# Altium PCB ESP-RC-Car.PcbDoc (part 1 of 2)
Units mm, origin at the board's own origin, x right, y up, seen from the top; angles counter-clockwise.
Board outline 95.25 x 60.25 mm, 4 copper layers (Top Layer, Int1 (Signal), Int2 (GND), Bottom Layer(PWR)), stack 1.586 mm thick; 116 components, 100 nets, 419 pads, 832 vias.
Unrouted connection lines stored in the file: 3.
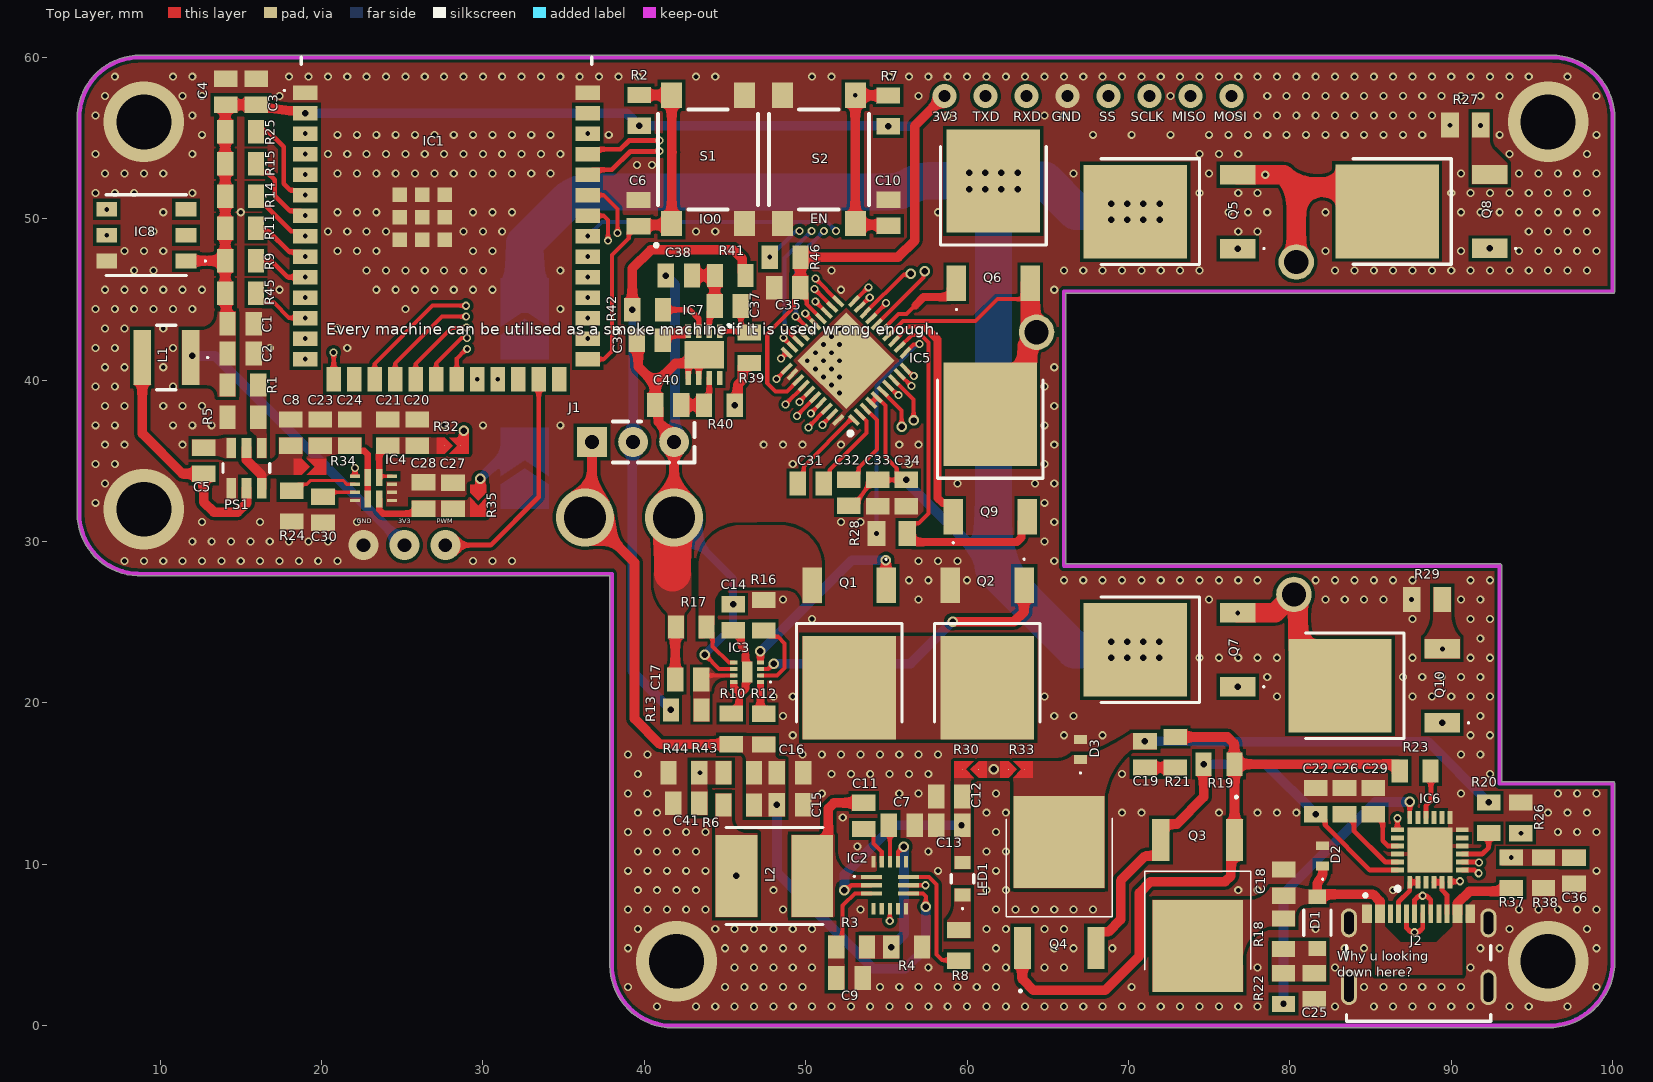
[diagram p0: Top Layer view]
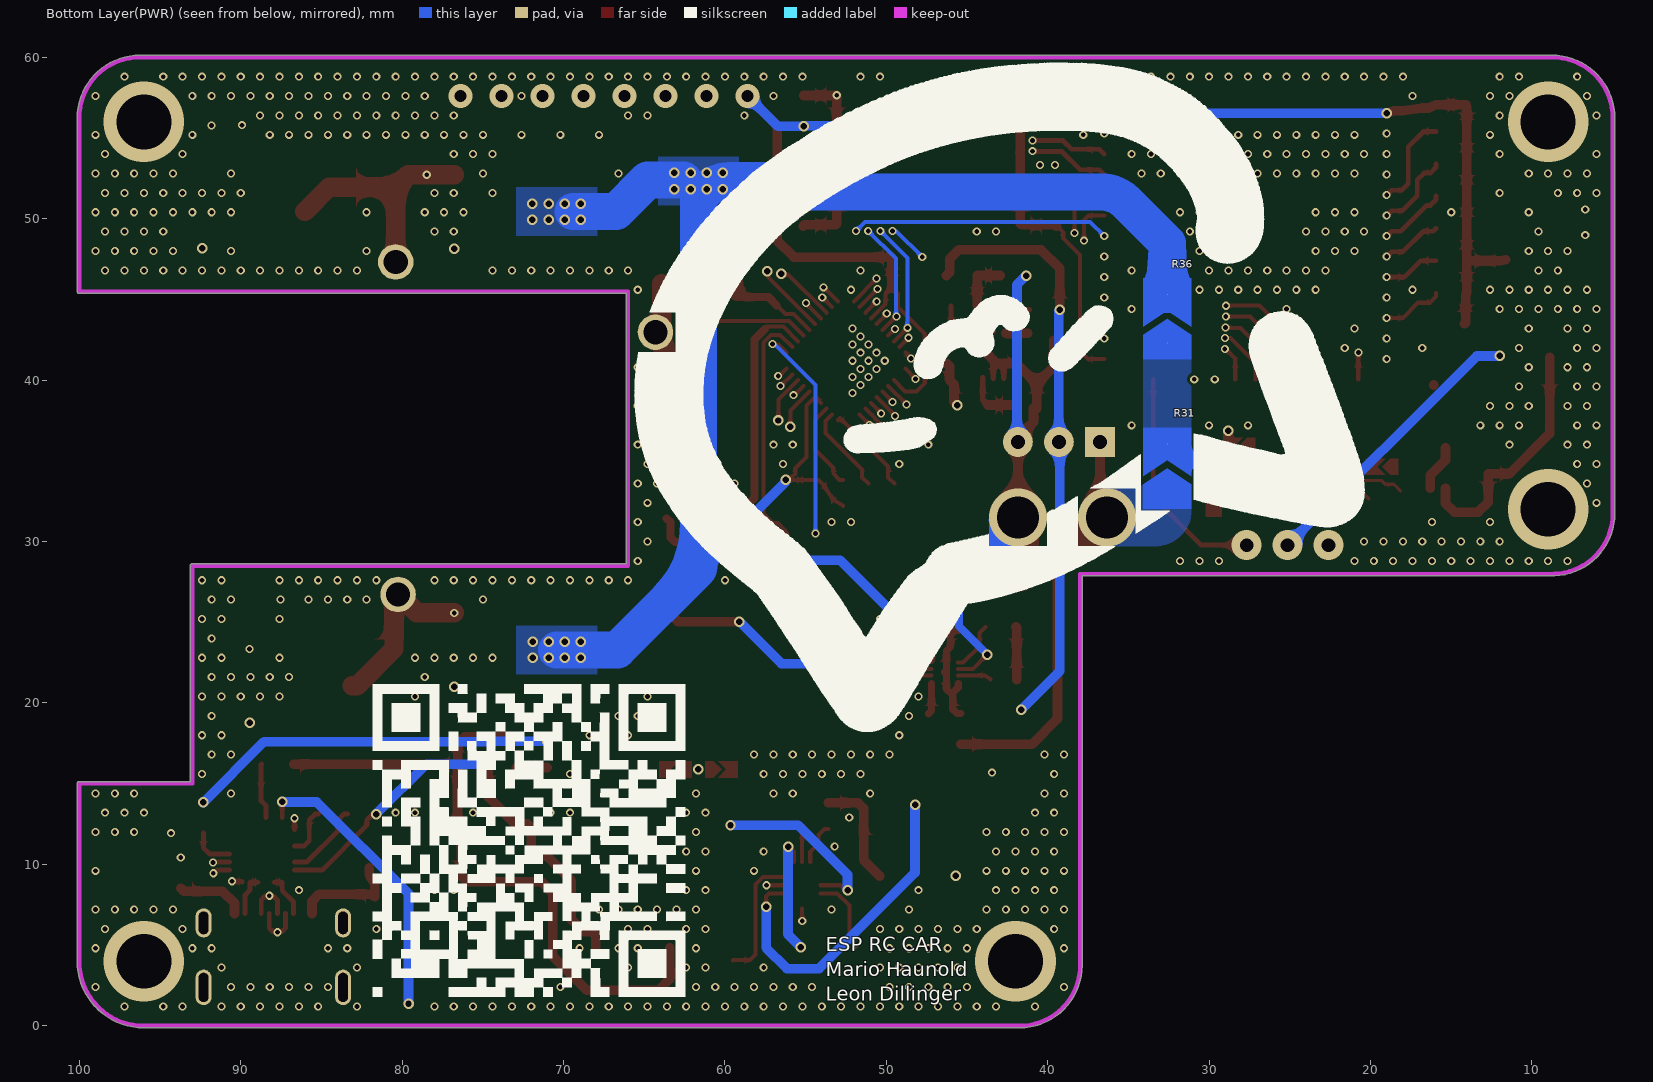
[diagram p1: Bottom Layer(PWR) view, seen from below]
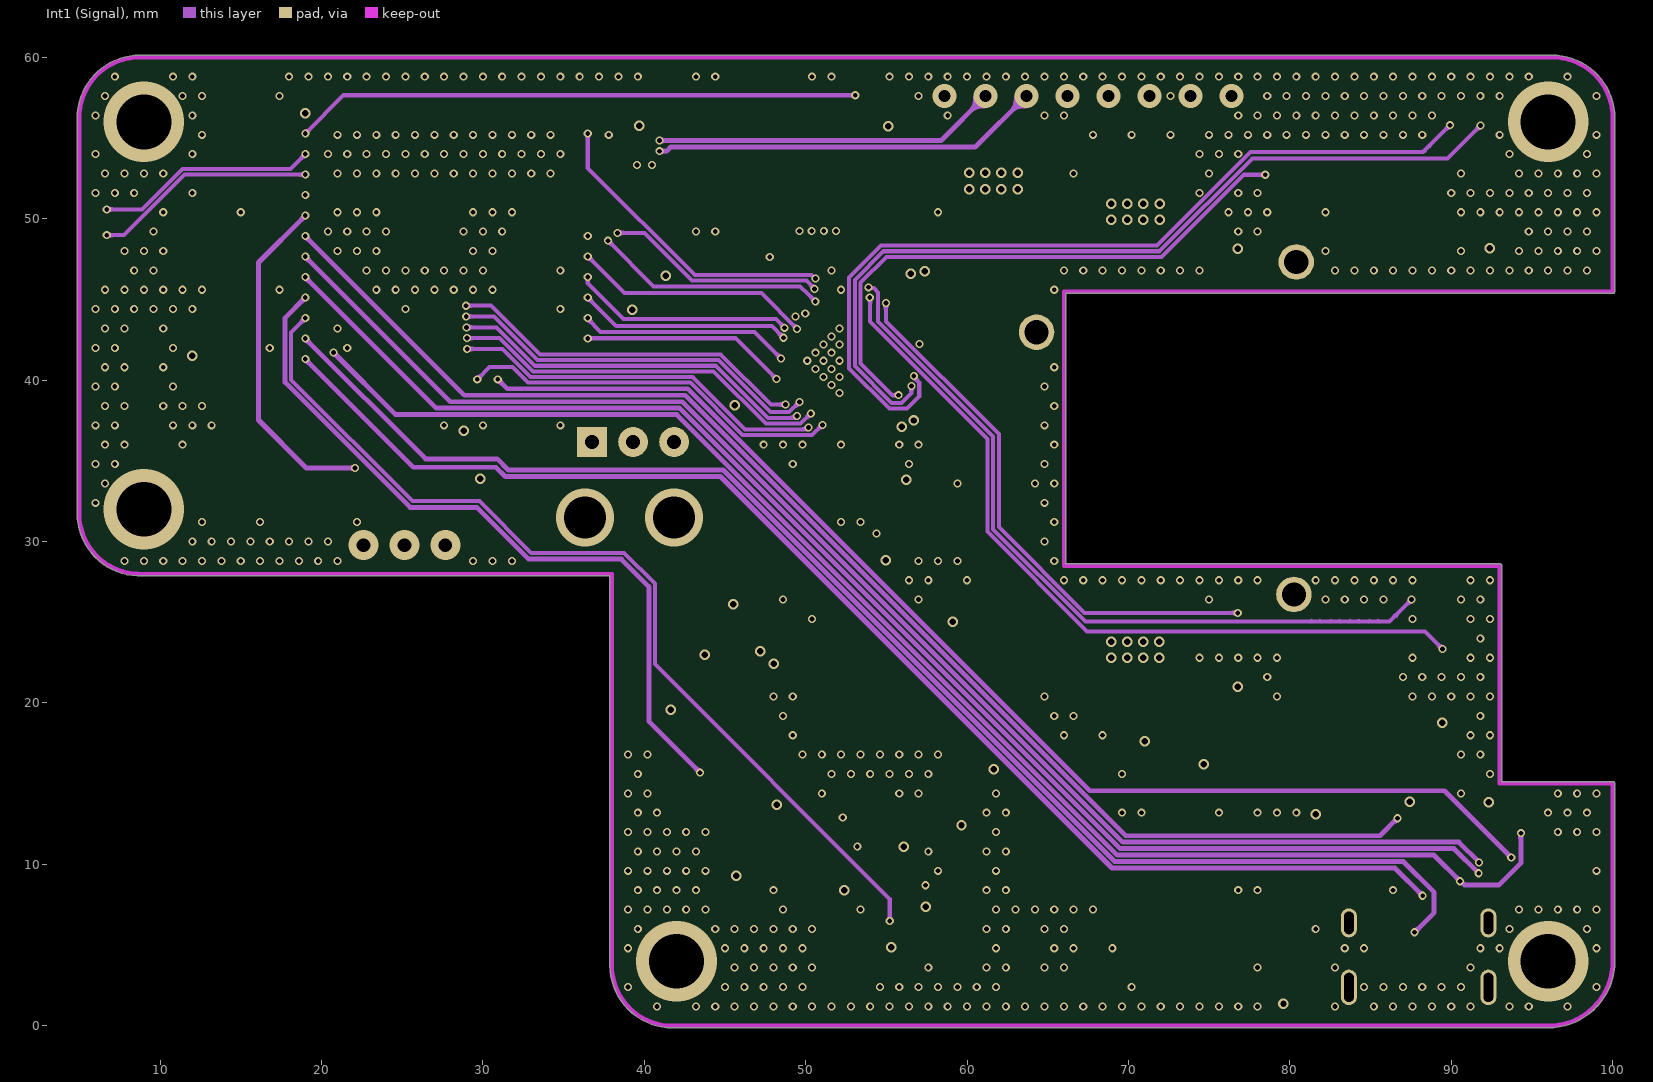
[diagram p2: Int1 (Signal)]
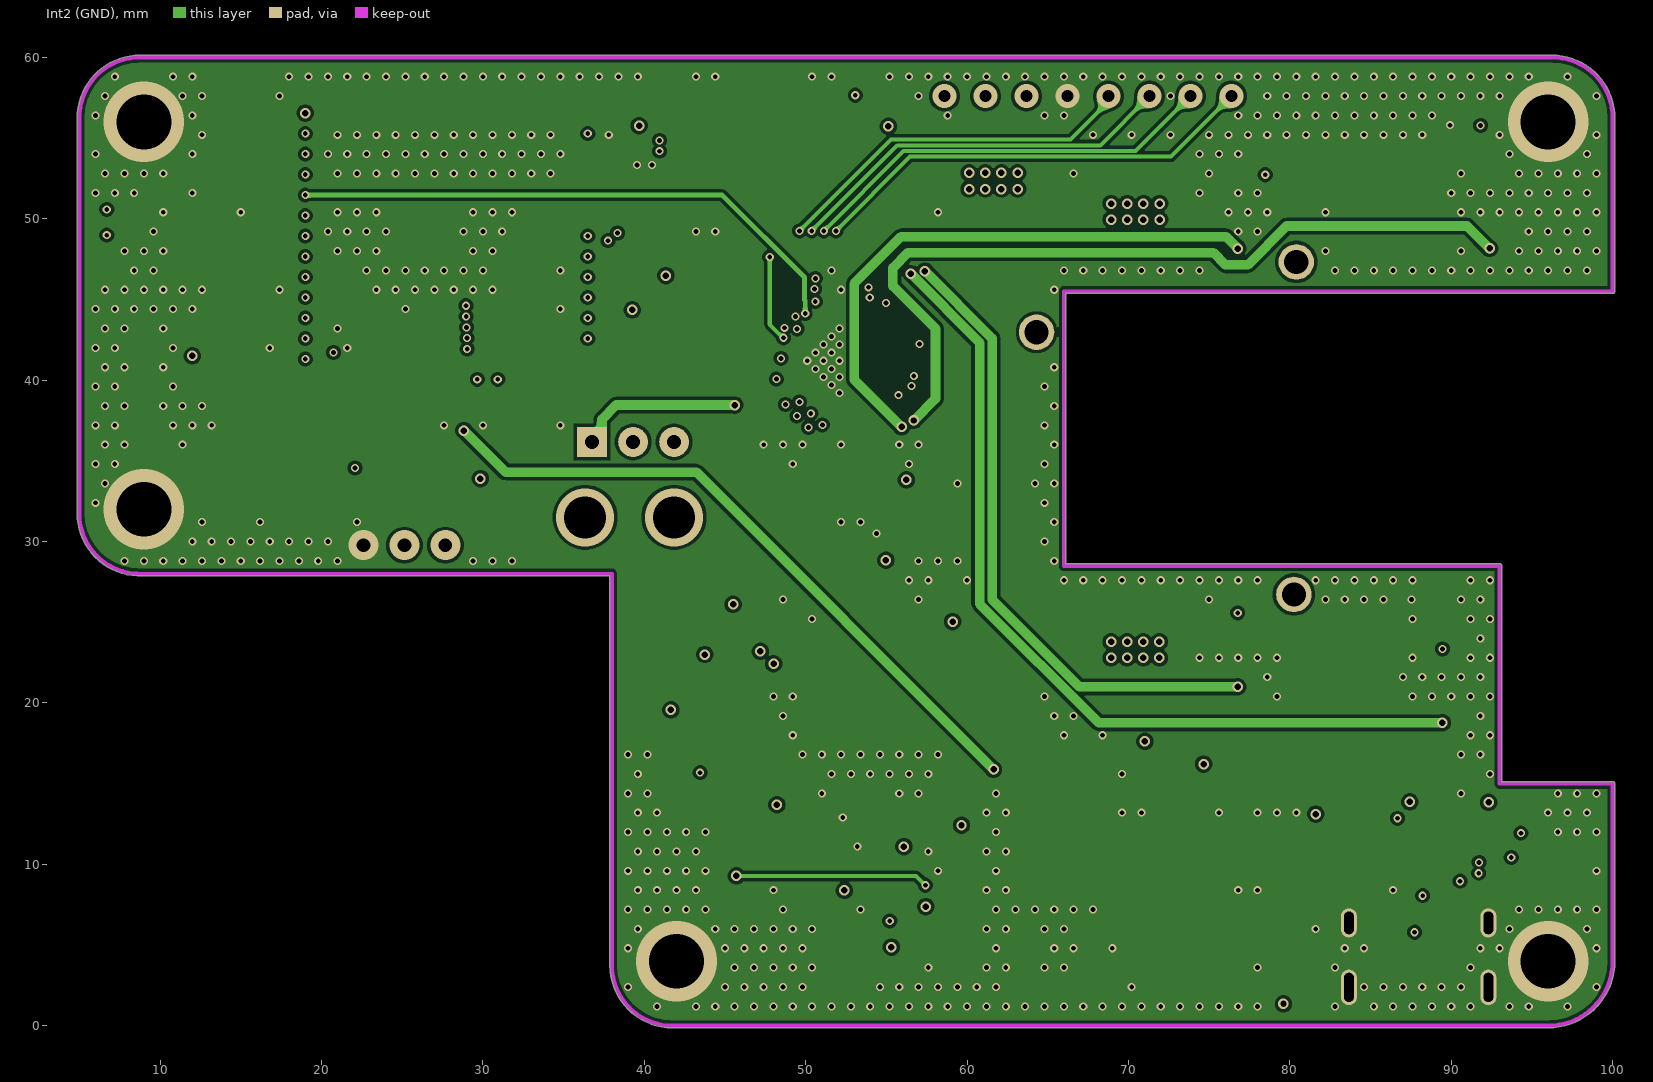
[diagram p3: Int2 (GND)]

## Layer stack, top to bottom
Top Solder: solder mask 0.0254, SM-001, Dk 4
Top Layer: signal copper 0.035
Dielectric 1: prepreg 0.2104, PP-017, Dk 4.3
Int1 (Signal): signal copper 0.0152
Dielectric 3: core 1.065, Core-039, Dk 4.8
Int2 (GND): signal copper 0.0152
Dielectric 5: prepreg 0.2104, PP-017, Dk 4.3
Bottom Layer(PWR): signal copper 0.035
Bottom Solder: solder mask 0.0254, SM-001, Dk 4

## Board outline
8.598,27.875 37.873,27.873 37.873,3.75 ccw(c41.75,3.75) 41.749,-0.127 41.75,-0.127 96,-0.127 ccw(c96,4) 100.127,4 100.127,5 100.127,15 ccw(c100,15) 100,15.127 93.127,15.127 93.127,28.5 ccw(c93,28.5) 93,28.627 66.127,28.627 66.127,45.373 100,45.373 ccw(c100,45.5) 100.127,45.5 100.127,56.25 ccw(c96.25,56.25) 96.25,60.127 8.8,60.127 8.75,60.127 ccw(c8.75,56.25) 4.873,56.25 4.873,31.75 ccw(c8.75,31.75)

## Design rules (kind name [scope] priority, off if disabled: settings)
Clearance [All] p1: gap=0.2 ignorepadtopadclearanceinfootprint=TRUE except(0.1: Arc-Arc Arc-Track Arc-SMDPad Arc-THPad Arc-Via Arc-Text Arc-Hole Track-Track Track-SMDPad Track-THPad Track-Via Track-Text Track-Hole SMDPad-SMDPad SMDPad-THPad SMDPad-Via SMDPad-Text SMDPad-Hole THPad-THPad THPad-Via THPad-Text THPad-Hole Via-Via Via-Text Via-Hole Text-Text Text-Hole)
HoleSize [All] p1: absolutevalues=TRUE maxlimit=10 minlimit=0.3 maxpercent=80.000 minpercent=20.000
HoleToHoleClearance [All] p1: gap=0.2 allowstackedmicrovias=TRUE
PlaneConnect [All] p1: planeconnectstyle=Direct reliefexpansion=0.508 reliefentries=4 reliefconductorwidth=0.254 reliefairgap=0.254
PolygonConnect [All] p1: connectstyle=Direct reliefconductorwidth=0.254 reliefentries=4 polygonreliefangle="90 Angle" airgapwidth=0.254
RoutingVias [All] p1: holewidth=10 width=10 viastyle="Through Hole" minholewidth=0.3 minwidth=0.4 maxholewidth=10 maxwidth=10
SilkToSolderMaskClearance [IsPad] p1: minsilkscreentomaskgap=0.15 clearancetoexposedcopper=TRUE
SolderMaskExpansion [All] p1: expansion=0 istentingtop=FALSE
SupplyNets "Schematic Supply Nets_10" [InNet('VBATM')] p1: voltage=0.000
SupplyNets "Schematic Supply Nets_9" [InNet('VBAT-')] p2: voltage=0.000
SupplyNets "Schematic Supply Nets_8" [InNet('VBAT+')] p3: voltage=0.000
SupplyNets "Schematic Supply Nets_2" [InNet('VDRAIN')] p4: voltage=0.000
SupplyNets "Schematic Supply Nets_3" [InNet('VBATJ')] p5: voltage=0.000
SupplyNets "Schematic Supply Nets_7" [InNet('GND')] p6: voltage=0.000
SupplyNets "Schematic Supply Nets_6" [InNet('VMCU')] p7: voltage=0.000
SupplyNets "Schematic Supply Nets_5" [InNet('VBUS')] p8: voltage=0.000
SupplyNets "Schematic Supply Nets_4" [InNet('VSYS')] p9: voltage=0.000
SupplyNets "Schematic Supply Nets" [InNet('3V3')] p10: voltage=0.000
Width [All] p1: maxlimit=10 minlimit=0.1 preferedwidth=0.254
26 further rules are at their usual default settings.

## Components (designator, comment, footprint, x,y, rotation, side; value= is the part's Value field where it differs from the comment)
C1 "0805 22uF" CAPC2012X94N 14.99,43.5 r0 top
C2 "0805 22uF" CAPC2012X94N 14.99,41.65 r0 top
C3 "0805 10uF" CAPC2012X94N 15.955,57.875 r270 top
C4 "0805 100nF" CAPC2012X94N 14.07,57.875 r270 top
C5 "0805 0.1uF" CAPC2012X94N 12.705,35.01 r270 top
C6 "0805 10nF" CAPC2012X94N 39.65,50.35 r270 top
C7 "0805 1uF" CAPC2012X94N 55.96,12.42 r0 top
C8 "0805 2.2uF" CAPC2012X94N 18.1,36.75 r270 top
C9 "0805 1uF" CAPC2012X94N 52.715,2.955 r180 top
C10 "0805 10nF" CAPC2012X94N 55.139,50.365 r90 top
C11 "0805 0.1uF" CAPC2012X94N 53.6,13 r90 top
C12 "0805 10uF" CAPC2012X94N 58.9,14.2 r0 top
C13 "0805 10uF" CAPC2012X94N 58.9,12.42 r0 top
C14 "0805 0.1uF" CAPC2012X94N 45.51,25.3 r270 top
C15 "0805 10uF" CAPC2012X94N 49.03,13.69 r180 top
C16 "0805 10uF" CAPC2012X94N 49.03,15.67 r180 top locked
C17 "0805 0.1F" CAPC2012X94N 42.73,21.455 r0 top
C18 "0805 100nF" CAPC2012X94N 79.615,8.87 r90 top
C19 "0805 100nF" CAPC2012X94N 71.02,16.81 r270 top
C20 "0805 1uF" CAPC2012X94N 25.94,36.75 r90 top
C21 "0805 10uF" CAPC2012X94N 24.109,36.75 r90 top
C22 "0805 1uF" CAPC2012X94N 81.605,13.92 r270 top
C23 "0805 1uF" CAPC2012X94N 19.925,36.75 r90 top
C24 "0805 10uF" CAPC2012X94N 21.75,36.75 r90 top
C25 "0805 100nF" CAPC2012X94N 81.51,2.455 r270 top
C26 "0805 1uF" CAPC2012X94N 83.385,13.92 r90 top
C27 "0805 1uF" CAPC2012X94N 28.158,32.846 r90 top
C28 "0805 10uF" CAPC2012X94N 26.325,32.85 r90 top
C29 "0805 1uF" CAPC2012X94N 85.165,13.92 r270 top
C30 "0805 1uF" CAPC2012X94N 20.1,31.975 r90 top
C31 "0805 47nF" CAPC2012X94N 50.31,33.595 r180 top
C32 "0805 1uF" CAPC2012X94N 52.675,33.015 r90 top
C33 "0805 0.1uF" CAPC2012X94N 54.46,33.01 r90 top
C34 "0805 10uF" CAPC2012X94N 56.24,33.01 r90 top
C35 "0805 0.1uF" CAPC2012X94N 48.865,45.73 r0 top
C36 "0805 10nF" CAPC2012X94N 97.605,9.605 r90 top
C37 "0805 0.1uF" CAPC2012X94N 45.175,44.595 r0 top
C38 "0805 0.1 uF" CAPC2012X94N 42.15,46.48 r0 top
C39 "0805 0.33uF" CAPC2012X94N 40.335,42.47 r0 top
C40 "0805 0.1uF" CAPC2012X94N 41.485,38.465 r0 top
C41 "0805 10nF" CAPC2012X94N 42.61,13.79 r0 top
D1 "Schottky" SODFL3517X110N 81.705,6.39 r90 top
D2 "ESDA25P35-1U1M" ESDA25P351U1M 82.03,10.525 r270 top
D3 "ESDA25P35-1U1M" ESDA25P351U1M 67.02,17.115 r270 top
IC1 "ESP32-S3-WROOM-1-N8" ESP32S3WROOM1N8R2 27.75,52.55 r0 top
IC2 "MP2615AGQ-Z" MP2615AGQZ 55.215,8.705 r0 top
IC3 "S-82B2AAA-A8T2U" S82B2AAAA8T2U 46.375,21.905 r90 top
IC4 "TPS2121RUXT" TPS2121RUXT 23.225,33.3 r90 top
IC5 "DRV8323SRTAR" QFN50P600X600X80-41N-D 52.505,41.205 r135 top
IC6 "STUSB4500QTR" QFN50P400X400X100-25N-D 88.68,10.89 r90 top
IC7 "BQ29200DRBT" SON65P300X300X100-9N-D 43.705,41.58 r270 top
IC8 "587-2056-247F" 5872056247F 9.16,48.98 r90 top
J1 "2s Battery" Sip-3 39.31,36.17 r0 top
J2 "USB4215-03-A_REVA" GCT_USB4215-03-A_REVA 87.98,2.375 r0 top
L1 "ASPI-4030S-5R6M-T" ASPI-4030S 10.4,41.4 r180 top
L2 "74404064068" INDPM6060X450N 48.06,9.28 r0 top
LED1 "150224BS73100" 150224BS73100 59.72,9.105 r90 top
PS1 "LMR51430XDDCR" SOT95P280X110-6N 15.355,34.55 r90 top
Q1 "IPD047N03LF2SATMA1" IPD047N03LF2SATMA1 52.695,23.055 r180 top
Q2 "IPD047N03LF2SATMA1" IPD047N03LF2SATMA1 61.245,23.055 r180 top
Q3 "DMP3007LK3-13" DMP3007LK313 74.289,6.52 r180 top
Q4 "DMP3007LK3-13" DMP3007LK313 65.709,9.805 r0 top
Q5 "IPD047N03LF2SATMA1" IPD047N03LF2SATMA1 72.54,50.44 r90 top
Q6 "IPD047N03LF2SATMA1" IPD047N03LF2SATMA1 61.63,50.225 r0 top
Q7 "IPD047N03LF2SATMA1" IPD047N03LF2SATMA1 72.535,23.29 r90 top
Q8 "IPD047N03LF2SATMA1" IPD047N03LF2SATMA1 88.14,50.45 r90 top
Q9 "IPD047N03LF2SATMA1" IPD047N03LF2SATMA1 61.44,35.775 r0 top
Q10 "IPD047N03LF2SATMA1" IPD047N03LF2SATMA1 85.215,21.06 r90 top
R1 "0805 100k" RESC2012X65N 15.14,39.7 r180 top
R2 "0805 22k" RESC2012X65N 39.686,56.714 r90 top
R3 "0805 10k" RESC2012X65N 52.845,4.88 r180 top
R4 "0805 10k" RESC2012X65N 56.25,4.88 r180 top
R5 "0805 22.1k" RESC2012X65N 15.14,37.7 r0 top
R6 "0805 50m" RESC2012X65N 45.86,13.68 r0 top
R7 "0805 22k" RESC2012X65N 55.125,56.675 r90 top
R8 "0805 1k" RESC2012X65N 59.495,4.98 r90 top
R9 "0805 22k" RESC2012X65N 14.995,47.395 r0 top
R10 "0805 100" RESC2012X65N 45.385,18.39 r270 top
R11 "0805 22k" RESC2012X65N 14.995,49.4 r0 top
R12 "0805 1k" RESC2012X65N 47.395,18.38 r270 top
R13 "0805 100" RESC2012X65N 42.6,19.565 r180 top
R14 "0805 22k" RESC2012X65N 14.995,51.4 r0 top
R15 "0805 22k" RESC2012X65N 14.995,53.405 r180 top
R16 "0805 1k" RESC2012X65N 47.4,25.43 r270 top
R17 "0805 4m" RESC2012X65N 42.915,24.705 r180 top
R18 "0805 470" RESC2012X65N 79.605,5.7 r90 top
R19 "0805 100k" RESC2012X65N 75.61,16.21 r180 top
R20 "0805 1k" RESC2012X65N 92.31,12.885 r90 top
R21 "0805 100" RESC2012X65N 72.91,16.94 r90 top
R22 "0805 1k" RESC2012X65N 79.605,2.305 r90 top
R23 "0805 22k" RESC2012X65N 87.755,15.785 r180 top
R24 "0805 22k" RESC2012X65N 18.15,32.2 r90 top
R25 "0805 24k" RESC2012X65N 14.995,55.4 r0 top
R26 "0805 100k" RESC2012X65N 94.31,12.88 r270 top
R27 "WSLP08057L000FEA18" RESC2013X58N 90.875,55.795 r0 top
R28 "WSLP08057L000FEA18" RESC2013X58N 55.345,30.49 r0 top
R29 "WSLP08057L000FEA18" RESC2013X58N 88.495,26.405 r0 top
R30 "Jumper" "Solder Jumper 5A" 61.21,16.38 r180 top
R31 "Jumper" "Solder Jumper 9A" 34.095,32.045 r90 top
R32 "Jumper" "Solder Jumper 5A" 27.13,35.445 r0 top
R33 "Jumper" "Solder Jumper 5A" 62.07,15.38 r0 top
R34 "Jumper" "Solder Jumper 5A" 18.29,34.14 r0 top
R35 "Jumper" "Solder Jumper 5A" 29.22,33.53 r270 top
R36 "Jumper" "Solder Jumper 9A" 34.095,41.305 r90 top
R37 "0805 1.8M" RESC2012X65N 93.715,9.475 r270 top
R38 "0805 1M" RESC2012X65N 95.715,9.475 r90 top
R39 "0805 160" RESC2012X65N 46.505,42.005 r270 top
R40 "0805 100" RESC2012X65N 44.655,38.455 r180 top
R41 "0805 260" RESC2012X65N 45.325,46.485 r0 top
R42 "0805 100" RESC2012X65N 40.205,44.355 r180 top
R43 "0805 1.8M" RESC2012X65N 45.86,15.68 r0 top
R44 "0805 1M" RESC2012X65N 42.46,15.68 r0 top
R45 "0805 22k" RESC2012X65N 14.995,45.395 r180 top
R46 "0805 24k" RESC2012X65N 48.725,47.62 r180 top
S1 "5x5mm Button" 430182070816 43.95,53.675 r90 top
S2 "5x5mm Button" 430182070816 50.825,53.675 r90 top

## Footprints (in the part's own frame and the unit in brackets; to place one, negate y for a bottom-side part, rotate by r counter-clockwise, add the part's x,y. Pads: shape width x height; smd on the part's side, far side on the other; paste and mask are expansions set on the pad)
150224BS73100 [mm]
  rect 0.8x1 smd: 1(-1,0) 2(1,0)
  silkscreen extent -1.9,-0.7 0.25,0.7, body extent -1.15,-0.7 1.15,0.7, height 1.31
5872056247F [mm]
  rect 0.9x1.3 smd: 1(-1.6,-2.46) 2(0,-2.46) 3(1.6,-2.46) 4(1.6,2.46) 5(0,2.46) 6(-1.6,2.46)
  silkscreen extent -2.5,-3.7 2.5,2.5, body extent -2.5,-2.68 2.5,2.68, height 1.58
430182070816 [mm]
  rect 1.55x1.3 smd: 1(-3.975,2.25) 2(-3.975,-2.25) 3(3.975,2.25) 4(3.975,-2.25)
  silkscreen extent -5.39,-3.1 3.1,3.29, body extent -4.5,-3.1 4.5,3.1, height 5
ASPI-4030S [mm]
  rect 1.1x3.4 smd: 1(-1.5,0) 2(1.5,0)
  silkscreen extent -2.6,-2 0.6,2, body extent -2,-2 2,2, height 3
CAPC2012X94N [mm]
  rect 1.02x1.47 smd: 1(-0.81,0) 2(0.81,0)
  body extent -1,-0.63 1,0.63, height 0.94
DMP3007LK313 [mm]
  rect 1.06x2.6 smd: 1(-2.286,-4.985) 3(2.286,-4.985)
  rect 5.632x5.7 smd: 2(-0.001,1.565)
  silkscreen extent -3.29,-7.7 3.29,3.05, body extent -3.3,-5.94 3.3,4.16, height 2.58
ESDA25P351U1M [mm]
  rect 0.55x0.8 smd: 1(0.625,0) 2(-0.625,0)
  silkscreen extent 1.4,-0.05 1.5,0.05, body extent -0.8,-0.5 0.8,0.5, height 0.57
ESP32S3WROOM1N8R2 [mm]
  rect 1.5x0.9 smd: 1(-8.75,5.26) 2(-8.75,3.99) 3(-8.75,2.72) 4(-8.75,1.45) 5(-8.75,0.18) 6(-8.75,-1.09) 7(-8.75,-2.36) 8(-8.75,-3.63) 9(-8.75,-4.9) 10(-8.75,-6.17) 11(-8.75,-7.44) 12(-8.75,-8.71) 13(-8.75,-9.98) 14(-8.75,-11.25) 27(8.75,-11.25) 28(8.75,-9.98) 29(8.75,-8.71) 30(8.75,-7.44) 31(8.75,-6.17) 32(8.75,-4.9) 33(8.75,-3.63) 34(8.75,-2.36) 35(8.75,-1.09) 36(8.75,0.18) 37(8.75,1.45) 38(8.75,2.72) 39(8.75,3.99) 40(8.75,5.26)
  rect 0.9x1.5 smd: 15(-6.985,-12.5) 16(-5.715,-12.5) 17(-4.445,-12.5) 18(-3.175,-12.5) 19(-1.905,-12.5) 20(-0.635,-12.5) 21(0.635,-12.5) 22(1.905,-12.5) 23(3.175,-12.5) 24(4.445,-12.5) 25(5.715,-12.5) 26(6.985,-12.5)
  rect 0.9x0.9 smd: 41(-1.5,-2.46) 42(-1.5,-1.06) 43(-2.9,-1.06) 44(-2.9,-2.46) 45(-2.9,-3.86) 46(-1.5,-3.86) 47(-0.1,-3.86) 48(-0.1,-2.46) 49(-0.1,-1.06)
  silkscreen extent -10.1,5.35 9,7.48, body extent -9,-12.75 9,12.75, height 2.7
GCT_USB4215-03-A_REVA [mm]
  rect 0.6x1.15 smd: A1_B12(-3.2,4.575) A4_B9(-2.4,4.575) B1_A12(3.2,4.575) B4_A9(2.4,4.575)
  rect 0.3x1.15 smd: A5(-1.25,4.575) A6(-0.25,4.575) A7(0.25,4.575) A8(1.25,4.575) B5(1.75,4.575) B6(0.75,4.575) B7(-0.75,4.575) B8(-1.75,4.575)
  oval 1x1.8 hole 0.6 slot 1.4 at 90 deg: SH1(-4.32,4) SH2(4.32,4)
  oval 1x2.2 hole 0.6 slot 1.8 at 90 deg: SH3(-4.32,0) SH4(4.32,0)
  silkscreen extent -4.47,-2.1 4.47,5.8, body extent -4.44,-2 4.5,4.75, height 3.28
INDPM6060X450N [mm]
  rect 2.6x5.1 smd: 1(-2.35,0) 2(2.35,0)
  silkscreen extent -3,-3 3,3, body extent -3,-3 3,3, height 4.5
IPD047N03LF2SATMA1 [mm]
  rect 1.2x2.2 smd: 1(-2.29,-4.235) 3(2.29,-4.235)
  rect 5.8x6.4 smd: 2(0,2.115)
  silkscreen extent -3.27,-5.9 3.27,4.24, body extent -3.3,-5.05 3.3,5.05, height 2.58
MP2615AGQZ [mm]
  rect 1.3x0.25 smd: 1(-1.15,0.5) 2(-1.15,0) 3(-1.15,-0.5) 9(1.15,-0.5) 10(1.15,0) 11(1.15,0.5)
  rect 0.25x0.7 smd: 4(-1,-1.45) 5(-0.5,-1.45) 6(0,-1.45) 7(0.5,-1.45) 8(1,-1.45) 12(1,1.45) 13(0.5,1.45) 14(0,1.45) 15(-0.5,1.45) 16(-1,1.45)
  silkscreen extent -2.25,0.5 -2.15,0.6, body extent -1.5,-1.5 1.5,1.5, height 1.1
QFN50P400X400X100-25N-D [mm]
  rect 0.8x0.3 smd: 1(-2,1.25) 2(-2,0.75) 3(-2,0.25) 4(-2,-0.25) 5(-2,-0.75) 6(-2,-1.25) 13(2,-1.25) 14(2,-0.75) 15(2,-0.25) 16(2,0.25) 17(2,0.75) 18(2,1.25)
  rect 0.3x0.8 smd: 7(-1.25,-2) 8(-0.75,-2) 9(-0.25,-2) 10(0.25,-2) 11(0.75,-2) 12(1.25,-2) 19(1.25,2) 20(0.75,2) 21(0.25,2) 22(-0.25,2) 23(-0.75,2) 24(-1.25,2)
  rect 2.8x2.8 smd: 25(0,0)
  silkscreen extent -2.52,1.88 -2.28,2.12, body extent -2.05,-2.05 2.05,2.05, height 1
QFN50P600X600X80-41N-D [mm]
  rect 0.85x0.25 smd: 1(-2.95,2.25) 2(-2.95,1.75) 3(-2.95,1.25) 4(-2.95,0.75) 5(-2.95,0.25) 6(-2.95,-0.25) 7(-2.95,-0.75) 8(-2.95,-1.25) 9(-2.95,-1.75) 10(-2.95,-2.25) 21(2.95,-2.25) 22(2.95,-1.75) 23(2.95,-1.25) 24(2.95,-0.75) 25(2.95,-0.25) 26(2.95,0.25) 27(2.95,0.75) 28(2.95,1.25) 29(2.95,1.75) 30(2.95,2.25)
  rect 0.25x0.85 smd: 11(-2.25,-2.95) 12(-1.75,-2.95) 13(-1.25,-2.95) 14(-0.75,-2.95) 15(-0.25,-2.95) 16(0.25,-2.95) 17(0.75,-2.95) 18(1.25,-2.95) 19(1.75,-2.95) 20(2.25,-2.95) 31(2.25,2.95) 32(1.75,2.95) 33(1.25,2.95) 34(0.75,2.95) 35(0.25,2.95) 36(-0.25,2.95) 37(-0.75,2.95) 38(-1.25,2.95) 39(-1.75,2.95) 40(-2.25,2.95)
  rect 4.25x4.25 smd: 41(0,0)
  silkscreen extent -3.5,2.88 -3.25,3.12, body extent -3,-3 3,3, height 1
RESC2012X65N [mm]
  rect 1x1.45 smd: 1(-0.95,0) 2(0.95,0)
  body extent -0.77,-0.4 0.77,0.4, height 0.46
RESC2013X58N [mm]
  rect 1.1x1.55 smd: 1(-0.95,0) 2(0.95,0)
  body extent -1.01,-0.64 1.01,0.64, height 0.36
S82B2AAAA8T2U [mm]
  rect 0.25x0.45 smd: 1(-0.6,-0.825) 2(-0.2,-0.825) 3(0.2,-0.825) 4(0.6,-0.825) 5(0.6,0.825) 6(0.2,0.825) 7(-0.2,0.825) 8(-0.6,0.825)
  rect 1.3x0.65 smd: 9(0,0)
  silkscreen extent -0.65,-1.5 -0.55,-1.4, body extent -0.8,-0.75 0.8,0.75, height 0.5
Sip-3 [mm]
  rect 1.85x1.85 hole 0.85: 1(-2.54,0)
  round 1.85 hole 0.85: 2(0,0) 3(2.54,0)
  silkscreen extent -1.23,-1.27 3.81,1.27
SODFL3517X110N [mm]
  rect 0.92x1.08 smd: 1(-1.6,0) 2(1.6,0)
  silkscreen extent -0.79,-0.85 0.79,0.85, body extent -1.75,-1.09 1.75,0.91, height 1.07
"Solder Jumper 5A" [mm]
  round 0.025 smd: 1(0.5,0.5) 2(1.5,0.5)
  Top Layer region: 0.8,0 1.3,0.5 0.8,1 2,1 2,0
  Top Layer region: 0,0 0,1 0.5,1 1,0.5 0.5,0
"Solder Jumper 9A" [mm]
  round 0.025 smd far side: 1(1,1.5) 2(4,1.5)
  Bottom Layer(PWR) region: 2,0 3,1.5 2,3 5,3 5,0
  Bottom Layer(PWR) region: 0,0 0,3 1.5,3 2.5,1.5 1.5,0
SON65P300X300X100-9N-D [mm]
  rect 0.85x0.35 smd: 1(-1.45,0.975) 2(-1.45,0.325) 3(-1.45,-0.325) 4(-1.45,-0.975) 5(1.45,-0.975) 6(1.45,-0.325) 7(1.45,0.325) 8(1.45,0.975)
  rect 1.7x2.45 smd: 9(0,0)
  silkscreen extent -1.84,1.53 -1.75,1.7, body extent -1.5,-1.5 1.5,1.5, height 0.77
SOT95P280X110-6N [mm]
  rect 1.25x0.6 smd: 1(-1.25,0.95) 2(-1.25,0) 3(-1.25,-0.95) 4(1.25,-0.95) 5(1.25,0) 6(1.25,0.95)
  silkscreen extent -0.27,-1.45 0.27,1.45, body extent -1.4,-1.45 1.4,1.45, height 0.97
TPS2121RUXT [mm]
  rect 1.05x0.4 smd: 1(-0.675,0.35) 2(-0.675,-0.35) 7(0.675,-0.35) 8(0.675,0.35)
  rect 0.2x0.6 smd: 3(-0.75,-1.15) 4(-0.25,-1.15) 5(0.25,-1.15) 6(0.75,-1.15) 9(0.75,1.15) 10(0.25,1.15) 11(-0.25,1.15) 12(-0.75,1.15)
  body extent -1.05,-1.3 1.05,1.3, height 1

## Part data
C1 C2: library part 08055A150JAT2A, "Capacitor 25V", Manufacturer_Name="Kyocera AVX", Mouser Part Number=581-08055A150J, Arrow Part Number=08055A150JAT2A, Arrow Price/Stock=https://www.arrow.com/en/products/08055a150jat2a/avx?region=nac, Datasheet Link=https://componentsearchengine.com/Datasheets/1/06031A100FAT2A.pdf, Height=0.94mm, Manufacturer_Part_Number=08055A150JAT2A, Mouser Price/Stock=https://www.mouser.co.uk/ProductDetail/AVX/08055A150JAT2A?qs=pZVDklL%2Fs8hiEua37sqbaA%3D%3D
C3 C4 C5 C6 C7 C8 C9 C10 C11 C12 C13 C14 C15 C16 C17 C36 C37 C38 C39 C40 C41: library part 08055A150JAT2A, "Capacitor", Manufacturer_Name="Kyocera AVX", Mouser Part Number=581-08055A150J, Arrow Part Number=08055A150JAT2A, Arrow Price/Stock=https://www.arrow.com/en/products/08055a150jat2a/avx?region=nac, Datasheet Link=https://componentsearchengine.com/Datasheets/1/06031A100FAT2A.pdf, Height=0.94mm, Manufacturer_Part_Number=08055A150JAT2A, Mouser Price/Stock=https://www.mouser.co.uk/ProductDetail/AVX/08055A150JAT2A?qs=pZVDklL%2Fs8hiEua37sqbaA%3D%3D
C18 C19 C20 C21 C22 C23 C24 C25 C26 C27 C28 C29 C30 C31 C34 C35: library part 08055A150JAT2A, "0805", Manufacturer_Name="Kyocera AVX", Mouser Part Number=581-08055A150J, Arrow Part Number=08055A150JAT2A, Arrow Price/Stock=https://www.arrow.com/en/products/08055a150jat2a/avx?region=nac, Datasheet Link=https://componentsearchengine.com/Datasheets/1/06031A100FAT2A.pdf, Height=0.94mm, Manufacturer_Part_Number=08055A150JAT2A, Mouser Price/Stock=https://www.mouser.co.uk/ProductDetail/AVX/08055A150JAT2A?qs=pZVDklL%2Fs8hiEua37sqbaA%3D%3D
C32: library part 08055A150JAT2A, "0805 16V X5R/X7R", Manufacturer_Name="Kyocera AVX", Mouser Part Number=581-08055A150J, Arrow Part Number=08055A150JAT2A, Arrow Price/Stock=https://www.arrow.com/en/products/08055a150jat2a/avx?region=nac, Datasheet Link=https://componentsearchengine.com/Datasheets/1/06031A100FAT2A.pdf, Height=0.94mm, Manufacturer_Part_Number=08055A150JAT2A, Mouser Price/Stock=https://www.mouser.co.uk/ProductDetail/AVX/08055A150JAT2A?qs=pZVDklL%2Fs8hiEua37sqbaA%3D%3D
C33: library part 08055A150JAT2A, "0805 VM rated", Manufacturer_Name="Kyocera AVX", Mouser Part Number=581-08055A150J, Arrow Part Number=08055A150JAT2A, Arrow Price/Stock=https://www.arrow.com/en/products/08055a150jat2a/avx?region=nac, Datasheet Link=https://componentsearchengine.com/Datasheets/1/06031A100FAT2A.pdf, Height=0.94mm, Manufacturer_Part_Number=08055A150JAT2A, Mouser Price/Stock=https://www.mouser.co.uk/ProductDetail/AVX/08055A150JAT2A?qs=pZVDklL%2Fs8hiEua37sqbaA%3D%3D
D1: library part PMEG3010ER, "Schottky Diode", Manufacturer_Name=Nexperia, Mouser Part Number=N/A, Datasheet Link=https://datasheet.datasheetarchive.com/originals/distributors/Datasheets-NXP/DSANXP010004875.pdf, Height=1.1mm, Manufacturer_Part_Number=PMEG3010ER, Mouser Price/Stock=https://www.mouser.co.uk/ProductDetail/Nexperia/PMEG3010ER?qs=vHuUswq2%252BswA%252BkrsHFmQzA%3D%3D
D2 D3: "TVS Diode (Uni-directional)", Manufacturer_Name=STMicroelectronics, Mouser Part Number=511-ESDA25P35-1U1M, Arrow Part Number=ESDA25P35-1U1M, Arrow Price/Stock=https://www.arrow.com/en/products/esda25p35-1u1m/stmicroelectronics?utm_currency=USD&region=europe, Datasheet Link=https://www.st.com/resource/en/datasheet/esda25p35-1u1m.pdf, Height=0.6mm, Manufacturer_Part_Number=ESDA25P35-1U1M, Mouser Price/Stock=https://www.mouser.co.uk/ProductDetail/STMicroelectronics/ESDA25P35-1U1M?qs=aVyJF2WnouQUWqgNP85ZrA%3D%3D
IC1: "Integrated Circuit", Manufacturer_Name="Espressif Systems", Mouser Part Number=356-ESP32-S3WROOM1N8, Datasheet Link=https://www.espressif.com/sites/default/files/documentation/esp32-s3-wroom-1_wroom-1u_datasheet_en.pdf, Height=3.25mm, Manufacturer_Part_Number=ESP32-S3-WROOM-1-N8, Mouser Price/Stock=https://www.mouser.co.uk/ProductDetail/Espressif-Systems/ESP32-S3-WROOM-1-N8?qs=Wj%2FVkw3K%252BMC1mq0KGPvoSQ%3D%3D
IC2: "Integrated Circuit", Manufacturer_Name="Monolithic Power Systems (MPS)", Mouser Part Number=946-MP2615AGQ-Z, Datasheet Link=https://www.monolithicpower.com/en/documentview/productdocument/index/version/2/document_type/Datasheet/lang/en/sku/MP2615AGQ-Z/document_id/1433/, Height=1mm, Manufacturer_Part_Number=MP2615AGQ-Z, Mouser Price/Stock=https://www.mouser.co.uk/ProductDetail/Monolithic-Power-Systems-MPS/MP2615AGQ-Z?qs=HiriQ40UqETtGEPnTGZTNQ%3D%3D
IC3: "Integrated Circuit", Manufacturer_Name="ABLIC Inc.", Mouser Part Number=628-S-82B2AAA-A8T2U, Datasheet Link=https://www.ablic.com/en/doc/datasheet/battery_protection/S82B2A_B_E.pdf, Height=0.4mm, Manufacturer_Part_Number=S-82B2AAA-A8T2U, Mouser Price/Stock=https://www.mouser.co.uk/ProductDetail/ABLIC/S-82B2AAA-A8T2U?qs=t7xnP681wgVKFpRRRjY2ng%3D%3D
IC4: "Integrated Circuit", Manufacturer_Name="Texas Instruments", Mouser Part Number=595-TPS2121RUXT, Arrow Part Number=TPS2121RUXT, Arrow Price/Stock=https://www.arrow.com/en/products/tps2121ruxt/texas-instruments?utm_currency=USD&region=nac, Datasheet Link=https://www.arrow.com/en/products/tps2121ruxt/texas-instruments, Height=1mm, Manufacturer_Part_Number=TPS2121RUXT, Mouser Price/Stock=https://www.mouser.co.uk/ProductDetail/Texas-Instruments/TPS2121RUXT?qs=l7cgNqFNU1i6abJCbO5ulQ%3D%3D
IC5: "Integrated Circuit", Manufacturer_Name="Texas Instruments", Mouser Part Number=595-DRV8323SRTAR, Arrow Part Number=DRV8323SRTAR, Arrow Price/Stock=https://www.arrow.com/en/products/drv8323srtar/texas-instruments?utm_currency=USD&region=nac, Datasheet Link=http://www.ti.com/lit/ds/symlink/drv8323.pdf, Height=0.8mm, Manufacturer_Part_Number=DRV8323SRTAR, Mouser Price/Stock=https://www.mouser.co.uk/ProductDetail/Texas-Instruments/DRV8323SRTAR?qs=u4fy%2FsgLU9P2gpPTX6mffg%3D%3D
IC6: "Integrated Circuit", Manufacturer_Name=STMicroelectronics, Mouser Part Number=511-STUSB4500QTR, Arrow Part Number=STUSB4500QTR, Arrow Price/Stock=https://www.arrow.com/en/products/stusb4500qtr/stmicroelectronics?utm_currency=USD&region=europe, Datasheet Link=https://www.st.com/resource/en/datasheet/stusb4500.pdf, Height=1mm, Manufacturer_Part_Number=STUSB4500QTR, Mouser Price/Stock=https://www.mouser.co.uk/ProductDetail/STMicroelectronics/STUSB4500QTR?qs=wUXugUrL1qyQbYMSzG1ujg%3D%3D
IC7: "Integrated Circuit", Manufacturer_Name="Texas Instruments", Mouser Part Number=595-BQ29200DRBT, Arrow Part Number=BQ29200DRBT, Arrow Price/Stock=https://www.arrow.com/en/products/bq29200drbt/texas-instruments?region=nac, Datasheet Link=http://www.ti.com/lit/ds/symlink/bq29200.pdf, Height=1mm, Manufacturer_Part_Number=BQ29200DRBT, Mouser Price/Stock=https://www.mouser.co.uk/ProductDetail/Texas-Instruments/BQ29200DRBT?qs=hEBn5lgDlCoXGMNHcYEAng%3D%3D
IC8: "Integrated Circuit", Manufacturer_Name=Dialight, Datasheet Link=https://s3-us-west-2.amazonaws.com/catsy.557/Dialight_datasheet_587-2056-247F_Addressable_RGB.pdf, Height=1.6mm, Manufacturer_Part_Number=587-2056-247F
J1: library part CON3, "Stecker"
J2: "USB-C (USB TYPE-C) USB 2.0 Receptacle Connector 24 (16+8 Dummy) Position Surface Mount, Right Angle; Through Hole", Package=None, Check_prices=https://www.snapeda.com/parts/USB4215-03-A/Global+Connector+Technology/view-part/?ref=eda, MF="Global Connector Technology", MP=USB4215-03-A, SnapEDA_Link=https://www.snapeda.com/parts/USB4215-03-A/Global+Connector+Technology/view-part/?ref=snap
L1: "Inductor", Manufacturer_Name=ABRACON, Mouser Part Number=815-ASPI-4030S-5R6MT, Datasheet Link=https://abracon.com/Magnetics/power/ASPI-4030S.pdf, Height=3mm, Manufacturer_Part_Number=ASPI-4030S-5R6M-T, Mouser Price/Stock=https://www.mouser.co.uk/ProductDetail/ABRACON/ASPI-4030S-5R6M-T?qs=BLmuIjeT3qEs6vBfg%2FqMFg%3D%3D
L2: "Inductor", Manufacturer_Name="Wurth Elektronik", Mouser Part Number=710-74404064068, Datasheet Link=https://katalog.we-online.com/pbs/datasheet/74404064068.pdf, Height=4.5mm, Manufacturer_Part_Number=74404064068, Mouser Price/Stock=https://www.mouser.co.uk/ProductDetail/Wurth-Elektronik/74404064068?qs=Zt3UNFD9mQgMbZzq9pg0zg%3D%3D
LED1: "LED", Manufacturer_Name="Wurth Elektronik", Mouser Part Number=710-150224BS73100, Datasheet Link=https://www.we-online.com/components/products/datasheet/150224BS73100.pdf, Height=1.41mm, Manufacturer_Part_Number=150224BS73100, Mouser Price/Stock=https://www.mouser.co.uk/ProductDetail/Wurth-Elektronik/150224BS73100?qs=5aG0NVq1C4w%2FjMuF9nAPXA%3D%3D
PS1: "Power Supply 500kHz", Manufacturer_Name="Texas Instruments", Mouser Part Number=595-LMR51430XDDCR, Arrow Part Number=LMR51430XDDCR, Arrow Price/Stock=https://www.arrow.com/en/products/lmr51430xddcr/texas-instruments?utm_currency=USD&region=nac, Datasheet Link=https://www.ti.com/lit/ds/symlink/lmr51430.pdf?HQS=dis-mous-null-mousermode-dsf-pf-null-wwe&ts=1665567212982&ref_url=https%253A%252F%252Fwww.mouser.co.uk%252F, Height=1.1mm, Manufacturer_Part_Number=LMR51430XDDCR, Mouser Price/Stock=https://www.mouser.co.uk/ProductDetail/Texas-Instruments/LMR51430XDDCR?qs=vvQtp7zwQdP8miJIr5Aupg%3D%3D
Q1 Q2 Q5 Q6 Q7 Q8 Q9 Q10: "MOSFET (N-Channel)", Manufacturer_Name=Infineon, Mouser Part Number=726-IPD047N03LF2SATM, Datasheet Link=https://www.infineon.com/cms/en/product/power/mosfet/n-channel/ipd047n03lf2s/, Height=2.52mm, Manufacturer_Part_Number=IPD047N03LF2SATMA1, Mouser Price/Stock=https://www.mouser.co.uk/ProductDetail/Infineon-Technologies/IPD047N03LF2SATMA1?qs=3vio67wFuYq5Cj1%2F9iYlBQ%3D%3D
Q3 Q4: "MOSFET (P-Channel)", Manufacturer_Name="Diodes Incorporated", Mouser Part Number=621-DMP3007LK3-13, Datasheet Link=https://www.diodes.com/assets/Datasheets/DMP3007LK3.pdf, Height=2.39mm, Manufacturer_Part_Number=DMP3007LK3-13, Mouser Price/Stock=https://www.mouser.co.uk/ProductDetail/Diodes-Incorporated/DMP3007LK3-13?qs=17u8i%2FzlE8%252BiIxnE0yV1ZQ%3D%3D
R1 R3 R4 R5 R6 R8 R10 R12 R13 R16 R17 R39 R40 R41 R42: library part CPF0805B102RE1, "Resistor low tolerance", Manufacturer_Name="TE Connectivity", Datasheet Link=http://docs-europe.electrocomponents.com/webdocs/13d1/0900766b813d116f.pdf, Height=0.65mm, Manufacturer_Part_Number=CPF0805B102RE1
R2 R7 R9 R11 R14 R15 R18 R19 R20 R21 R22 R23 R24 R25 R26 R30 R31 R32 R33 R34 R35 R36 R37 R38 R43 R44 R45 R46: library part CPF0805B102RE1, "Resistor", Manufacturer_Name="TE Connectivity", Datasheet Link=http://docs-europe.electrocomponents.com/webdocs/13d1/0900766b813d116f.pdf, Height=0.65mm, Manufacturer_Part_Number=CPF0805B102RE1
R27 R28 R29: "Resistor", Manufacturer_Name=Vishay, Mouser Part Number=71-WSLP08057L000FEA1, Arrow Part Number=WSLP08057L000FEA18, Arrow Price/Stock=https://www.arrow.com/en/products/wslp08057l000fea18/vishay?region=nac, Datasheet Link=https://www.vishay.com/docs/30298/wslp18.pdf, Height=0.584mm, Manufacturer_Part_Number=WSLP08057L000FEA18, Mouser Price/Stock=https://www.mouser.co.uk/ProductDetail/Vishay-Dale/WSLP08057L000FEA18?qs=yAJ577jGV70jP0rOIAdIIA%3D%3D
S1 S2: library part 430182050816, "Switch", Manufacturer_Name="Wurth Elektronik", Mouser Part Number=710-430182050816, Datasheet Link=http://katalog.we-online.de/em/datasheet/4301x2xxx8x6.pdf, Manufacturer_Part_Number=430182050816, Mouser Price/Stock=https://www.mouser.co.uk/ProductDetail/Wurth-Elektronik/430182050816?qs=wr8lucFkNMUyle0jQPgWGw%3D%3D

## Free pads (board coordinates)
  round 2.2 hole 1.5: 6(64.305,42.97) 6(80.25,26.72) 6(80.4,47.32)

## Via types
v1: diameter 0.5, hole 0.3, Top Layer to Bottom Layer(PWR), tented both sides, 751 vias
v2: diameter 0.65, hole 0.4, Top Layer to Bottom Layer(PWR), tented both sides, 63 vias
v3: diameter 1.5, hole 0.75, Top Layer to Bottom Layer(PWR), 8 vias
v4: diameter 5, hole 3.4, Top Layer to Bottom Layer(PWR), 5 vias
v5: diameter 1.85, hole 0.85, Top Layer to Bottom Layer(PWR), 3 vias
v6: diameter 3.6, hole 2.6, Top Layer to Bottom Layer(PWR), 2 vias

## Nets (pads, with @x,y where several pads share a name; then routed paths per layer and width w, separated by ;. In a path a pad name is that pad's centre, name@x,y a point inside that pad or via, vN(x,y) a via of type N, cw(c..) or ccw(c..) an arc to the next point about the centre after c; other vN are vias at no path point)
3V3: C1.1 C2.1 C3.2 C4.2 C35.2 IC1.2 IC5.24 IC5.33 IC8.1 L1.1 R1.2 R2.1 R7.1 R9.1 R11.1 R14.1 R15.2 R25.1 R45.2 R46.1 | length 110.5
  Top Layer w0.25: IC5.33@49.535,40.003 48.837,39.305 48.14,39.305 47.62,39.825 47.62,42.867 49.29,44.537 49.29,45.345 C35.2@49.675,45.73 50.06,45.345 50.06,44.711 IC5.24@50.949,43.821
  Top Layer w0.6: IC8.1@11.62,47.46 11.97,47.395 R9.1@14.045,47.395 ; C1.1@14.18,43.5 14.113,43.567 14.113,45.328 R45.2@14.045,45.395 R9.1@14.045,47.395 ; v2(19,56.54) 18.55,56.69 18.105,56.69 cw(c18.105,57.29) 18.027,56.695 16.879,56.85 ccw(c16.8,56.255) 16.8,56.855 16.39,56.855 C3.2@15.955,57.065 C4.2@14.07,57.065 14.045,56.855 R25.1@14.045,55.4 R15.2@14.045,53.405 R14.1@14.045,51.4 R11.1@14.045,49.4 R9.1@14.045,47.395 ; C35.2@49.675,45.73 R46.1@49.675,47.62 55.73,47.62 56.765,48.655 56.765,55.762 v3(58.598,57.595)
  Bottom Layer(PWR) w0.6: v2(12,41.5) 13.415,41.5 v5(25.14,29.775) ; v2(19,56.54) 38.896,56.54 39.672,55.764 55.073,55.764 v2@55.102,55.735 ; v2@55.111,55.725 56.728,55.725 v3(58.598,57.595)
  other v2: 55.125,55.725 39.686,55.764
ALERT: IC1.8 IC6.19 R14.2 | length 88.4
  Top Layer w0.3: R14.2@15.945,51.4 15.945,51.175 16.295,50.825 16.52,50.825 18.125,49.22 18.7,49.22 v1(19,48.92) ; IC6.19@86.665,12.14 v1(86.665,12.855)
  Int1 (Signal) w0.3: v1(19,48.92) 28.855,39.065 42.53,39.065 69.82,11.775 85.585,11.775 v1(86.665,12.855)
CAL: IC1.28 IC5.31 | length 13.5
  Top Layer w0.25: v1(48.184,40.062) 48.184,40.066 IC5.31@48.828,40.71
  Int1 (Signal) w0.25: v1@36.605,42.595 45.651,42.595 v1(48.184,40.062)
  other v1: 36.5,42.57
CC1: IC6.1 IC6.2 J2.A5 | length 2.7
  Top Layer w0.3: J2.A5@86.73,6.95 86.73,7.675 87.43,8.375 IC6.1@87.43,8.89 IC6.2@87.93,8.89
CC2: IC6.4 IC6.5 J2.B5 | length 2.6
  Top Layer w0.3: IC6.4@88.93,8.89 IC6.5@89.43,8.89 89.43,8.4 89.73,8.1 J2.B5@89.73,6.95
CHARGE: IC1.12 IC2.6 R45.1 | length 63.5
  Top Layer w0.25: R45.1@15.945,45.395 15.945,45.17 16.32,44.795 17.06,44.795 18,43.855 18.985,43.855 v1(19,43.84) ; v1(55.21,6.495) 55.215,6.5 IC2.6@55.215,7.255
  Int1 (Signal) w0.25: v1(19,43.84) 18.125,42.965 18.125,40.02 25.645,32.5 29.78,32.5 32.995,29.285 38.76,29.285 40.66,27.385 40.66,22.41 55.21,7.86 v1(55.21,6.495)
DN: IC1.13 J2.A7 J2.B7 | length 90.1
  Top Layer w0.3: J2.B7@87.23,6.95 87.23,6.05 87.486,5.794 v1(87.73,5.794) 87.974,5.794 88.23,6.05 J2.A7@88.23,6.95
  Int1 (Signal) w0.3: v1(19,42.57) 26.45,35.12 30.89,35.12 31.58,34.43 44.889,34.43 69.144,10.175 87.035,10.175 88.94,8.27 88.94,7.004 v1(87.73,5.794)
DP: IC1.14 J2.A6 J2.B6 | length 85.9
  Top Layer w0.3: J2.A6@87.73,6.95 87.73,7.8 87.986,8.056 v1(88.23,8.056) 88.474,8.056 88.73,7.8 J2.B6@88.73,6.95
  Int1 (Signal) w0.3: v1(19,41.3) 25.695,34.605 30.81,34.605 31.385,34.03 44.724,34.03 68.979,9.775 86.511,9.775 v1(88.23,8.056)
EN: C10.1 IC1.3 R7.2 S2.2 S2.4 | length 47.2
  Top Layer w0.6: R7.2@55.125,57.625 55.113,57.637 53.088,57.637 v1(53.075,57.65) 53.075,53.81 S2.2@53.075,49.7 53.148,49.627 55.066,49.627 C10.1@55.139,49.555
  Int1 (Signal) w0.25: v1(19,55.27) 21.38,57.65 v1(53.075,57.65)
ENABLE: IC1.29 IC5.30 | length 13.5
  Top Layer w0.25: v1(48.475,41.35) 48.827,41.702 IC5.30@48.828,41.7
  Int1 (Signal) w0.25: v1@36.473,43.813 37.29,42.995 46.83,42.995 v1(48.475,41.35)
  other v1: 36.5,43.84
GHA: IC5.6 Q5.1 | length 38
  Top Layer w0.25: IC5.6@54.768,39.296 55.032,39.032 55.032,39.027 55.945,38.114 v2(55.945,37.1)
  Int2 (GND) w0.6: v2(55.945,37.1) 53.01,40.035 53.01,45.975 55.92,48.885 76.04,48.885 v2(76.775,48.15)
GHB: IC5.15 Q6.1 | length 6.2
  Top Layer w0.25: IC5.15@54.768,43.114 55.754,44.1 56.24,44.1 56.775,44.635 56.795,44.635
  Top Layer w0.5: 56.795,44.635 57.3,45.14 58.99,45.14 Q6.1@58.99,45.64
  Top Layer w1: Q6.1@59.24,45.39 59.34,45.49 Q6.1@59.34,45.99
GHC: IC5.16 Q7.1 | length 44
  Top Layer w0.25: IC5.16@54.414,43.468 56.96,46.013 57.313,46.367 57.313,46.673 v2(57.39,46.75)
  Int2 (GND) w0.6: v2(57.39,46.75) 61.56,42.58 61.56,26.405 66.965,21 v2(76.77,21)
GLA: IC5.8 Q8.1 | length 53.4
  Top Layer w0.25: IC5.8@55.475,40.003 55.936,39.542 55.94,39.542 56.219,39.264 56.219,39.259 56.683,38.794 56.683,37.517 v2(56.7,37.5)
  Int2 (GND) w0.6: v2(56.7,37.5) 58.05,38.85 58.05,43.185 55.4,45.835 55.4,46.95 56.345,47.895 75.26,47.895 76.01,47.145 77.395,47.145 79.8,49.55 90.971,49.55 92.361,48.16 v2(92.375,48.16)
GLB: IC5.13 Q9.1 | length 15.3
  Top Layer w0.25: IC5.13@55.475,42.407 56.378,43.31 57.39,43.31 57.525,43.175
  Top Layer w0.5: 57.525,43.175 58.175,42.525 58.175,32.708 58.493,32.39 58.8,32.39 Q9.1@58.895,32.295 ; Q9.1@58.895,31.795 Q9.1@59.15,31.54
  Top Layer w0.7: Q9.1@58.885,32.285 59.135,32.035 Q9.1@59.135,31.535
GLC: IC5.18 Q10.1 | length 57.7
  Top Layer w0.25: IC5.18@53.707,44.175 56.051,46.518 56.438,46.518 v2(56.515,46.595)
  Int2 (GND) w0.6: v2(56.515,46.595) 60.785,42.325 60.785,26.145 68.16,18.77 v2(89.45,18.77)
GND: C1.2 C2.2 C3.1 C4.1 C6.1 C7.2 C8.1 C9.1 C10.2 C12.1 C13.1 C15.1 C16.1 C18.2 C20.2 C21.2 C22.1 C23.2 C24.2 C25.2 C26.2 C27.2 C28.2 C29.1 C30.1 C33.1 C34.1 C35.1 C36.1 C41.1 D2.2 D3.2 IC1.1 IC1.40 IC1.41 IC1.42 IC1.43 IC1.44 IC1.45 IC1.46 IC1.47 IC1.48 IC1.49 IC2.8 IC2.16 IC4.3 IC4.4 IC4.5 IC4.12 IC5.10 IC5.11 IC5.20 IC5.32 IC5.40 IC5.41 IC6.10 IC6.12 IC6.13 IC6.22 IC6.25 IC8.6 J2.A1_B12 J2.B1_A12 J2.SH1 J2.SH2 J2.SH3 J2.SH4 PS1.1 Q2.3 R4.1 R5.1 R16.1 R24.1 R26.1 R27.1 R28.1 R29.1 R38.1 R44.1 S1.2 S1.4 S2.1 S2.3 | length 117
  Top Layer w0.25: IC5.20@53,44.882 53.868,45.75 v1(53.9,45.75) ; IC5.10@56.182,40.71 56.64,40.252 v1(56.702,40.252) ; IC5.11@56.182,41.7 56.695,42.213 57.013,42.213 v1(57.043,42.243)
  Int1 (Signal) w0.25: v1(53.9,45.75) 53.948,45.702 54.223,45.702 54.495,45.43 54.495,43.625 61.615,36.505 61.615,30.755 67.33,25.04 86.18,25.04 v1(87.545,26.405) ; v1(56.702,40.252) 56.702,40.184 57.038,39.848 57.038,38.988 56.292,38.242 55.183,38.242 52.7,40.725 52.7,46.355 54.68,48.335 71.77,48.335 77.555,54.12 88.25,54.12 v1(89.925,55.795)
  Bottom Layer(PWR) w0.25: v1(54.395,30.49) 54.395,39.707 56.807,42.118 56.851,42.118 56.976,42.243 v1(57.043,42.243)
  other v1: 40.8,1.2 43.2,1.2 44.4,1.2 45.6,1.2 46.8,1.2 48,1.2 49.2,1.2 50.4,1.2 51.6,1.2 52.8,1.2 54,1.2 55.2,1.2 56.4,1.2 57.6,1.2 58.8,1.2 60,1.2 61.2,1.2 62.4,1.2 63.6,1.2 64.8,1.2 66,1.2 67.2,1.2 68.4,1.2 69.6,1.2 70.8,1.2 72,1.2 73.2,1.2 74.4,1.2 75.6,1.2 76.8,1.2 78,1.2 82.8,1.2 85.2,1.2 86.4,1.2 87.6,1.2 88.8,1.2 90,1.2 91.2,1.2 93.6,1.2 94.8,1.2 97.2,1.2 39,2.4 45,2.4 46.2,2.4 47.4,2.4 48.6,2.4 49.8,2.4 54.6,2.4 55.8,2.4 57,2.4 58.2,2.4 59.4,2.4 60.6,2.4 61.8,2.4 70.2,2.4 84.6,2.4 85.8,2.4 87,2.4 88.2,2.4 89.4,2.4 90.6,2.4 99,2.4 45.6,3.6 46.8,3.6 48,3.6 49.2,3.6 50.4,3.6 57.6,3.6 61.2,3.6 62.4,3.6 64.8,3.6 66,3.6 78,3.6 82.8,3.6 91.2,3.6 39,4.8 45,4.8 46.2,4.8 47.4,4.8 48.6,4.8 49.8,4.8 61.8,4.8 65.4,4.8 66.6,4.8 69,4.8 83.4,4.8 84.6,4.8 91.8,4.8 93,4.8 99,4.8 39.6,6 44.4,6 45.6,6 46.8,6 48,6 49.2,6 50.4,6 61.2,6 62.4,6 64.8,6 66,6 81.6,6 93.6,6 98.4,6 39,7.2 40.2,7.2 41.4,7.2 42.6,7.2 43.8,7.2 48.6,7.2 53.4,7.2 61.8,7.2 63,7.2 64.2,7.2 65.4,7.2 66.6,7.2 67.8,7.2 94.2,7.2 95.4,7.2 96.6,7.2 97.8,7.2 99,7.2 39.6,8.4 40.8,8.4 42,8.4 43.2,8.4 48,8.4 61.2,8.4 62.4,8.4 76.8,8.4 78,8.4 86.4,8.4 39,9.6 40.2,9.6 41.4,9.6 42.6,9.6 43.8,9.6 58.2,9.6 61.8,9.6 99,9.6 39.6,10.8 40.8,10.8 42,10.8 43.2,10.8 57.6,10.8 61.2,10.8 62.4,10.8 53.2,11.1 39,12 40.2,12 41.4,12 42.6,12 43.8,12 61.8,12 96.6,12 97.8,12 99,12 52.3,12.9 39.6,13.2 40.8,13.2 61.2,13.2 62.4,13.2 69.6,13.2 70.8,13.2 75.6,13.2 78,13.2 79.2,13.2 80.4,13.2 96,13.2 97.2,13.2 98.4,13.2 39,14.4 40.2,14.4 51,14.4 55.8,14.4 57,14.4 61.8,14.4 90.6,14.4 96.6,14.4 97.8,14.4 99,14.4 39.6,15.6 51.6,15.6 52.8,15.6 54,15.6 55.2,15.6 56.4,15.6 57.6,15.6 69.6,15.6 92.4,15.6 39,16.8 40.2,16.8 49.8,16.8 51,16.8 52.2,16.8 53.4,16.8 54.6,16.8 55.8,16.8 57,16.8 58.2,16.8 90.6,16.8 91.8,16.8 49.2,18 66,18 68.4,18 91.2,18 92.4,18 48.6,19.2 65.4,19.2 66.6,19.2 91.8,19.2 48,20.4 49.2,20.4 64.8,20.4 79.2,20.4 87.6,20.4 88.8,20.4 90,20.4 91.2,20.4 92.4,20.4 78.6,21.6 87,21.6 88.2,21.6 89.4,21.6 90.6,21.6 91.8,21.6 74.4,22.8 75.6,22.8 76.8,22.8 78,22.8 79.2,22.8 87.6,22.8 91.2,22.8 92.4,22.8 91.8,24 50.4,25.2 87.6,25.2 91.2,25.2 92.4,25.2 48.6,26.4 57,26.4 75,26.4 82.2,26.4 83.4,26.4 84.6,26.4 85.8,26.4 90.6,26.4 91.8,26.4 56.4,27.6 57.6,27.6 60,27.6 66,27.6 67.2,27.6 68.4,27.6 69.6,27.6 70.8,27.6 72,27.6 73.2,27.6 74.4,27.6 75.6,27.6 76.8,27.6 78,27.6 81.6,27.6 82.8,27.6 84,27.6 85.2,27.6 86.4,27.6 87.6,27.6 91.2,27.6 92.4,27.6 7.8,28.8 9,28.8 10.2,28.8 11.4,28.8 12.6,28.8 13.8,28.8 15,28.8 16.2,28.8 17.4,28.8 18.6,28.8 19.8,28.8 21,28.8 29.4,28.8 30.6,28.8 31.8,28.8 57,28.8 58.2,28.8 59.4,28.8 65.4,28.8 12,30 13.2,30 14.4,30 15.6,30 16.8,30 18,30 19.2,30 20.4,30 64.8,30 12.6,31.2 16.2,31.2 22.2,31.2 52.2,31.2 53.4,31.2 65.4,31.2 6,32.4 64.8,32.4 6.6,33.6 59.4,33.6 64.2,33.6 65.4,33.6 6,34.8 7.2,34.8 49.2,34.8 56.4,34.8 64.8,34.8 6.6,36 7.8,36 11.4,36 47.4,36 48.6,36 49.8,36 52.2,36 55.8,36 57,36 65.4,36 6,37.2 7.2,37.2 10.8,37.2 12,37.2 13.2,37.2 27.6,37.2 30,37.2 34.8,37.2 64.8,37.2 6.6,38.4 7.8,38.4 10.2,38.4 11.4,38.4 12.6,38.4 65.4,38.4 52.1,39.2 6,39.6 7.2,39.6 10.8,39.6 64.8,39.6 51.6,39.7 51.1,40.2 52.1,40.2 50.6,40.7 51.6,40.7 6.6,40.8 7.8,40.8 10.2,40.8 65.4,40.8 50.1,41.2 51.1,41.2 52.1,41.2 50.6,41.7 51.6,41.7 6,42 7.2,42 10.8,42 16.8,42 21.6,42 51.1,42.2 52.1,42.2 51.6,42.7 6.6,43.2 7.8,43.2 10.2,43.2 21,43.2 52.1,43.2 6,44.4 7.2,44.4 8.4,44.4 9.6,44.4 10.8,44.4 12,44.4 25.2,44.4 34.8,44.4 6.6,45.6 7.8,45.6 9,45.6 10.2,45.6 11.4,45.6 12.6,45.6 17.4,45.6 23.4,45.6 24.6,45.6 25.8,45.6 27,45.6 28.2,45.6 29.4,45.6 30.6,45.6 52.2,45.6 65.4,45.6 8.4,46.8 9.6,46.8 22.8,46.8 24,46.8 25.2,46.8 26.4,46.8 27.6,46.8 28.8,46.8 30,46.8 34.8,46.8 51.6,46.8 66,46.8 67.2,46.8 68.4,46.8 69.6,46.8 70.8,46.8 72,46.8 73.2,46.8 74.4,46.8 82.8,46.8 84,46.8 85.2,46.8 86.4,46.8 87.6,46.8 88.8,46.8 90,46.8 91.2,46.8 92.4,46.8 93.6,46.8 94.8,46.8 96,46.8 97.2,46.8 98.4,46.8 7.8,48 9,48 10.2,48 21,48 22.2,48 23.4,48 29.4,48 30.6,48 82.2,48 90.6,48 94.2,48 95.4,48 96.6,48 97.8,48 99,48 9.6,49.2 20.4,49.2 21.6,49.2 22.8,49.2 24,49.2 28.8,49.2 30,49.2 31.2,49.2 43.2,49.2 44.4,49.2 76.8,49.2 78,49.2 94.8,49.2 96,49.2 97.2,49.2 98.4,49.2 10.2,50.4 15,50.4 21,50.4 22.2,50.4 23.4,50.4 29.4,50.4 30.6,50.4 31.8,50.4 58.2,50.4 76.2,50.4 77.4,50.4 78.6,50.4 82.2,50.4 90.6,50.4 91.8,50.4 93,50.4 94.2,50.4 95.4,50.4 96.6,50.4 97.8,50.4 99,50.4 6,51.6 7.2,51.6 8.4,51.6 12,51.6 74.4,51.6 76.8,51.6 78,51.6 90,51.6 91.2,51.6 92.4,51.6 93.6,51.6 94.8,51.6 96,51.6 97.2,51.6 98.4,51.6 6.6,52.8 7.8,52.8 9,52.8 10.2,52.8 21,52.8 22.2,52.8 23.4,52.8 24.6,52.8 25.8,52.8 27,52.8 28.2,52.8 29.4,52.8 30.6,52.8 31.8,52.8 33,52.8 34.2,52.8 66.6,52.8 75,52.8 90.6,52.8 94.2,52.8 95.4,52.8 96.6,52.8 97.8,52.8 99,52.8 39.55,53.33 40.48,53.33 6,54 12,54 20.4,54 21.6,54 22.8,54 24,54 25.2,54 26.4,54 27.6,54 28.8,54 30,54 31.2,54 32.4,54 33.6,54 34.8,54 74.4,54 75.6,54 76.8,54 93.6,54 98.4,54 12.6,55.2 21,55.2 22.2,55.2 23.4,55.2 24.6,55.2 25.8,55.2 27,55.2 28.2,55.2 29.4,55.2 30.6,55.2 31.8,55.2 33,55.2 34.2,55.2 37.8,55.2 67.8,55.2 70.2,55.2 72.6,55.2 75,55.2 76.2,55.2 77.4,55.2 78.6,55.2 79.8,55.2 81,55.2 82.2,55.2 83.4,55.2 84.6,55.2 85.8,55.2 87,55.2 88.2,55.2 93,55.2 99,55.2 6,56.4 12,56.4 58.8,56.4 64.8,56.4 66,56.4 76.8,56.4 78,56.4 79.2,56.4 80.4,56.4 81.6,56.4 82.8,56.4 84,56.4 85.2,56.4 86.4,56.4 87.6,56.4 88.8,56.4 6.6,57.6 11.4,57.6 12.6,57.6 17.4,57.6 57,57.6 72.6,57.6 78.6,57.6 79.8,57.6 81,57.6 82.2,57.6 83.4,57.6 84.6,57.6 85.8,57.6 87,57.6 88.2,57.6 89.4,57.6 90.6,57.6 91.8,57.6 93,57.6 99,57.6 7.2,58.8 10.8,58.8 12,58.8 18,58.8 19.2,58.8 20.4,58.8 21.6,58.8 22.8,58.8 24,58.8 25.2,58.8 26.4,58.8 27.6,58.8 28.8,58.8 30,58.8 31.2,58.8 32.4,58.8 33.6,58.8 34.8,58.8 36,58.8 37.2,58.8 38.4,58.8 39.6,58.8 43.2,58.8 44.4,58.8 50.4,58.8 51.6,58.8 55.2,58.8 56.4,58.8 57.6,58.8 58.8,58.8 60,58.8 61.2,58.8 62.4,58.8 63.6,58.8 64.8,58.8 66,58.8 67.2,58.8 68.4,58.8 69.6,58.8 70.8,58.8 72,58.8 73.2,58.8 74.4,58.8 75.6,58.8 76.8,58.8 78,58.8 79.2,58.8 80.4,58.8 81.6,58.8 82.8,58.8 84,58.8 85.2,58.8 86.4,58.8 87.6,58.8 88.8,58.8 90,58.8 91.2,58.8 92.4,58.8 93.6,58.8 94.8,58.8 97.2,58.8
  other v3: 66.218,57.595
  other v4: 42,4 96,4 9,32 9,56 96,56
  other v5: 22.6,29.775